# Altium PCB PCB1.PcbDoc
Units mil, origin at the board's own origin, x right, y up, seen from the top; angles counter-clockwise.
Board outline 6000 x 4000 mil, 2 copper layers (Top Layer, Bottom Layer); 26 components, 14 nets, 53 pads, 0 vias.
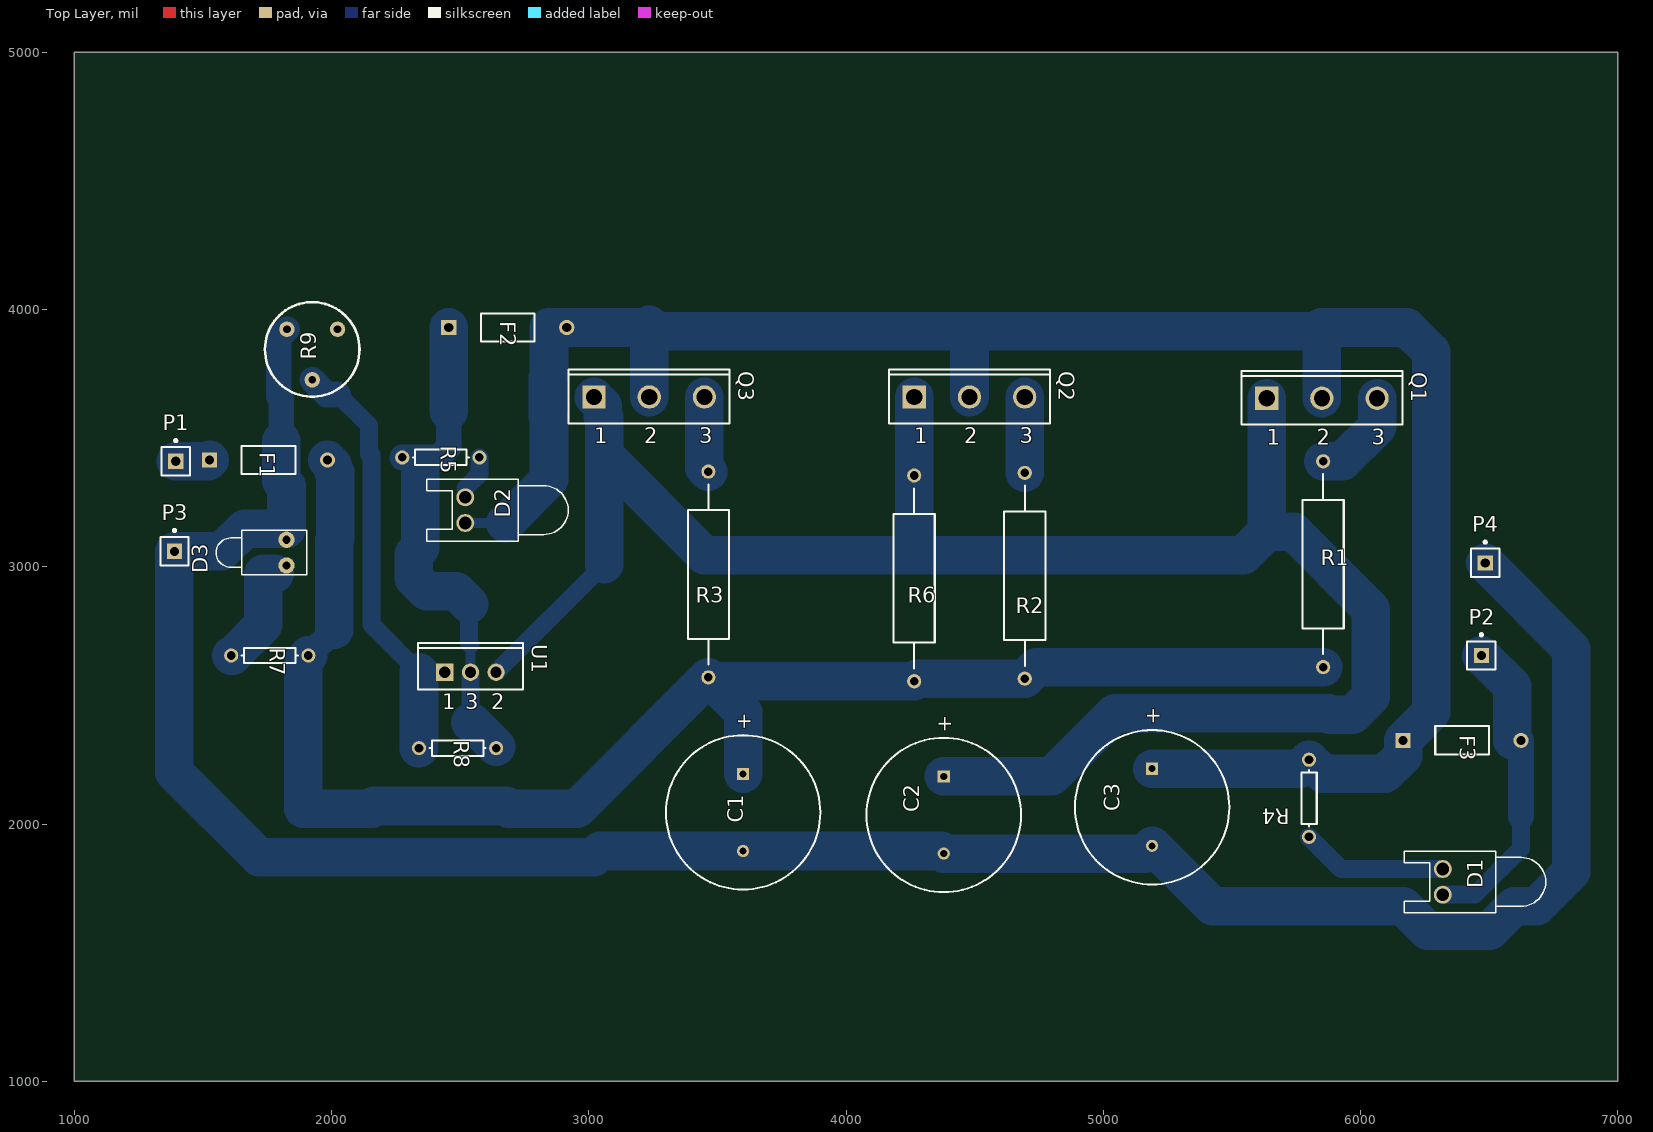
[diagram p0: Top Layer view]
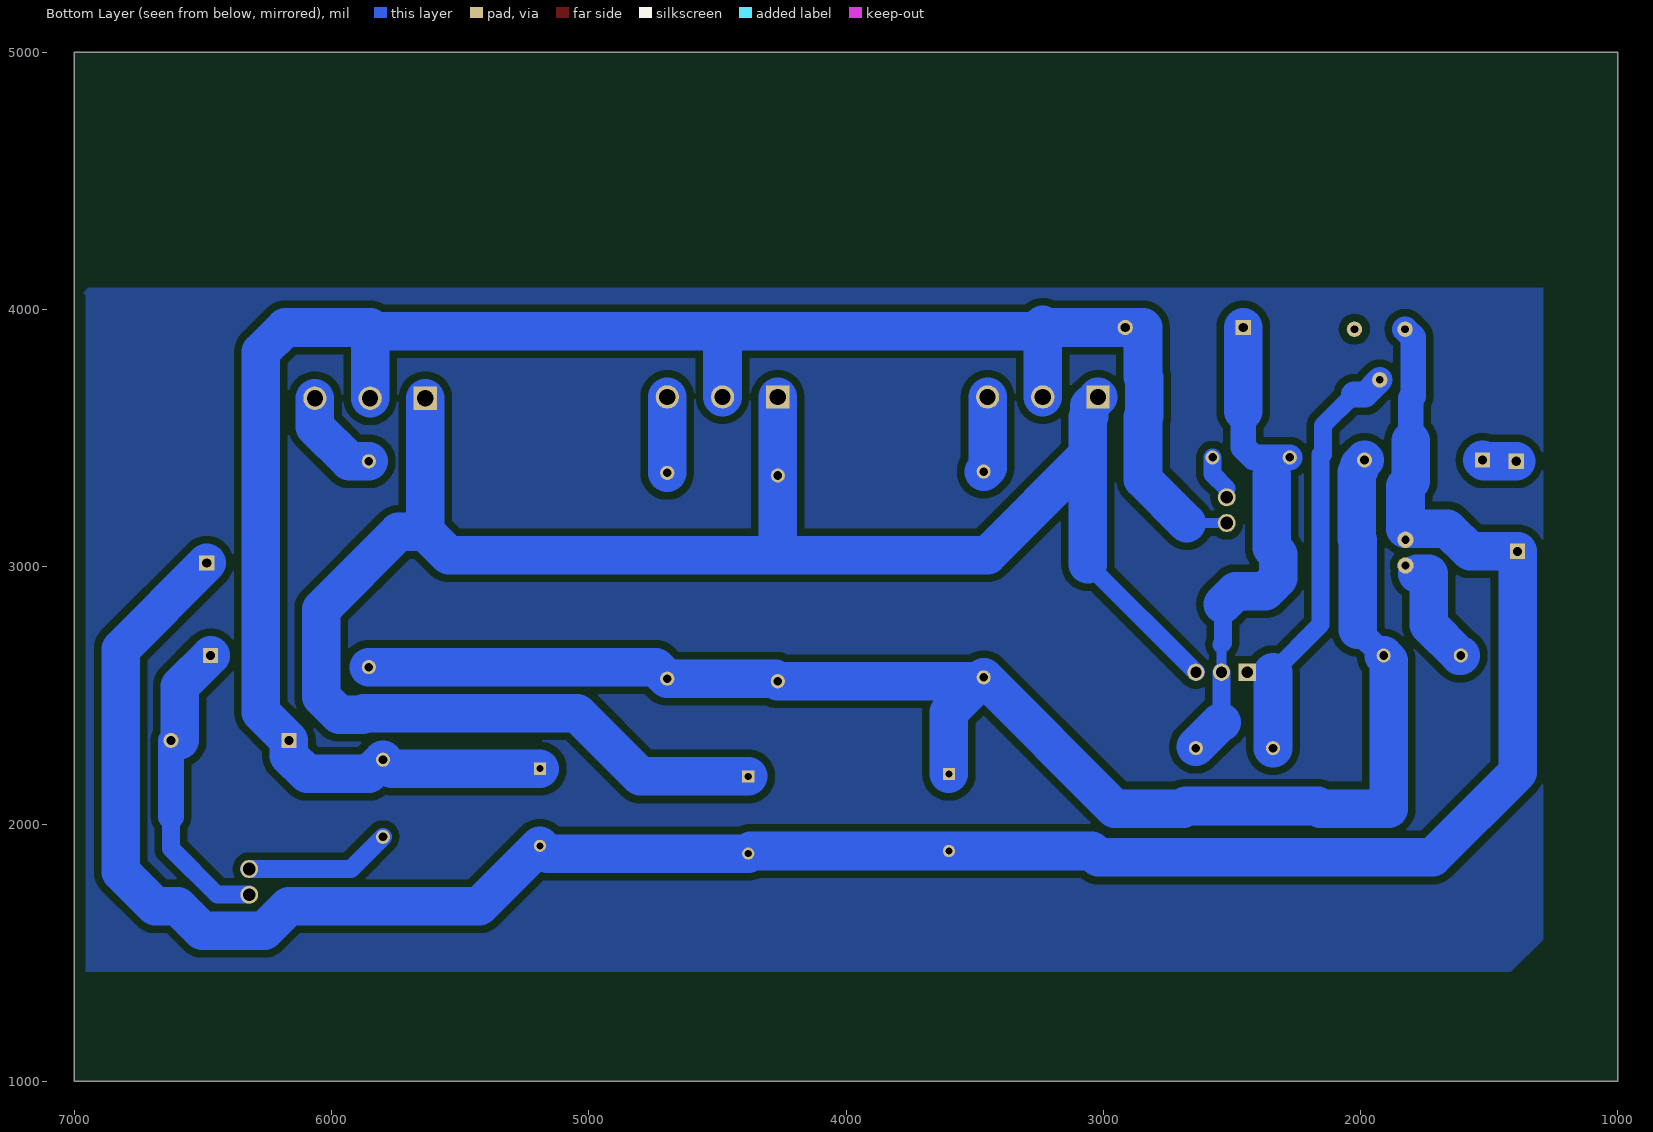
[diagram p1: Bottom Layer view, seen from below]

## Layer stack, top to bottom
Top Solder: solder mask 0.4, Solder Resist, Dk 3.5
Top Layer: signal copper 1.4
Dielectric 1: dielectric 12.6, FR-4, Dk 4.8
Bottom Layer: signal copper 1.4
Bottom Solder: solder mask 0.4, Solder Resist, Dk 3.5

## Board outline
1000,1000 7000,1000 7000,5000 1000,5000

## Design rules (kind name [scope] priority, off if disabled: settings)
Clearance [All] p1: gap=30
PolygonConnect [All] p1: connectstyle=Relief reliefconductorwidth=10 reliefentries=4 polygonreliefangle="90 Angle" airgapwidth=10
RoomDefinition Sheet1 [InComponentClass('Sheet1')] p1: confinementstyle=ConfineIn formatcopy=TRUE lockcomponents=FALSE outline 1265,1410 6985,1410 6985,4090 1265,4090
RoutingLayers [All] p1: top layer_v5=FALSE bottom layer_v5=TRUE
RoutingVias [All] p1: holewidth=28 width=50 viastyle="Through Hole" minholewidth=28 minwidth=50 maxholewidth=28 maxwidth=50
SolderMaskExpansion [All] p1: expansion=4
Width [All] p1: maxlimit=200 minlimit=40 preferedwidth=100
29 further rules are at their usual default settings.

## Components (designator, comment, footprint, x,y, rotation, side; value= is the part's Value field where it differs from the comment)
C1 "Cap Pol1" RB7.6-15 3600,2045 r90 top
C2 "Cap Pol1" RB7.6-15 4380,2035 r90 top
C3 "Cap Pol1" RB7.6-15 5190,2065 r90 top
D1 "LED0" LED-0 6320,1775 r90 top
D2 "LED0" LED-0 2520,3220 r90 top
D3 "LED1" LED-1 1825,3055 r180 top
F1 "Fuse 2" PIN-W2/E2.8 1755,3415 r0 top
F2 "Fuse 1" PIN-W2/E2.8 2685,3930 r0 top
F3 "Fuse 1" PIN-W2/E2.8 6395,2325 r0 top
P1 "Plug" PIN1 1394.33,3410 r0 top
P2 "Plug" PIN1 6470,2655 r0 top
P3 "Plug" PIN1 1389.33,3060 r0 top
P4 "Plug" PIN1 6485,3015 r0 top
Q1 "PNP" TO247 5850,3655 r0 top
Q2 "PNP" TO247 4480,3660 r0 top
Q3 "PNP" TO247 3235,3660 r0 top
R1 "Res2" AXIAL-0.8 5855,3010 r90 top
R2 "Res2" AXIAL-0.8 4695,2965 r90 top
R3 "Res2" AXIAL-0.8 3465,2970 r90 top
R4 "Res1" AXIAL-0.3 5800,2100 r270 top
R5 "Res1" AXIAL-0.3 2425,3425 r0 top
R6 "Res2" AXIAL-0.8 4265,2955 r90 top
R7 "Res1" AXIAL-0.3 1760,2655 r0 top
R8 "Res2" AXIAL-0.3 2490,2295 r0 top
R9 "RPot" POT_10K 1925,3825 r180 top
U1 "LM317T" TO220ABN 2540,2590 r0 top

## Footprints (in the part's own frame and the unit in brackets; to place one, negate y for a bottom-side part, rotate by r counter-clockwise, add the part's x,y. Pads: shape width x height; smd on the part's side, far side on the other; paste and mask are expansions set on the pad)
AXIAL-0.3 [mm] "Axial Device, Thru-Hole; 2 Leads; 0.3 in Pin Spacing"
  round 1.4 hole 0.85: 1(-3.81,0) 2(3.81,0)
  silkscreen extent -2.77,-0.76 2.77,0.76
AXIAL-0.8 [mm] "Axial Device, Thru-Hole; 2 Leads; 0.8 in Pin Spacing"
  round 1.4 hole 0.85: 1(-10.16,0) 2(10.16,0)
  silkscreen extent -8.89,-2.03 8.89,2.03
LED-0 [mil] "LED; 2 Leads"
  round 70 hole 50: 1(50,0) 2(-50,0)
  silkscreen extent -120,-400 120,150
LED-1 [mm] "LED; 2 Leads"
  round 1.6 hole 0.8: 1(0,1.27) 2(0,-1.27)
  silkscreen extent -2,-2.2 6.95,2.2
PIN1 [mm] "Connector; Plug"
  rect 1.5x1.5 hole 0.9: 1(0,0)
  silkscreen extent -1.4,-1.4 1.4,2.17
PIN-W2/E2.8 [mm] "Thru-Hole; 2 Leads"
  rect 1.5x1.5 hole 0.9: 1(-5.825,0)
  round 1.5 hole 0.9: 2(5.825,0)
  silkscreen extent -2.65,-1.4 2.65,1.4
POT_10K [mil]
  round 60 hole 30: 1(-98.43,-98.43) 2(0,98.43) 3(98.43,-98.43)
  silkscreen extent -184,-204 184,164
RB7.6-15 [mm] "Polarized Capacitor (Radial); 2 Leads"
  rect 1.2x1.2 hole 0.7: 1(3.81,0)
  round 1.2 hole 0.7: 2(-3.81,0)
  silkscreen extent -7.62,-7.62 7.62,7.62
TO220ABN [mm] "TO, Thru-Hole, Vertical, Heatsink Mounted; 3 In-Line Leads; Pitch 2.54 mm; Pin sequence 1, 3, 2"
  rect 1.7x1.7 hole 1.1: 1(-2.54,0)
  round 1.7 hole 1.1: 2(2.54,0) 3(0,0)
  silkscreen extent -5.2,-1.7 5.2,2.9
TO247 [mm] "SIP with Mounting Hole; 3 Leads; Body 20 x 15.6 x 5 mm (typ); Pitch 5.45 mm"
  rect 2.3x2.3 hole 1.6: 1(-5.45,0)
  round 2.3 hole 1.6: 2(0,0) 3(5.45,0)
  silkscreen extent -7.95,-2.6 7.95,2.7

## Part data
C1 C2 C3: "Polarized Capacitor (Radial)"
D1 D2: "Typical INFRARED GaAs LED"
D3: "Typical RED GaAs LED"
F1 F2 F3: "Fuse"
Q1 Q2 Q3: "PNP Bipolar Transistor"
R1 R2 R3 R4 R5 R6 R7 R8: "Resistor"
R9: "Potentiometer"
U1: "1.2V to 37V Voltage Regulator"

## Nets (pads, with @x,y where several pads share a name; then routed paths per layer and width w, separated by ;. In a path a pad name is that pad's centre, name@x,y a point inside that pad or via, vN(x,y) a via of type N, cw(c..) or ccw(c..) an arc to the next point about the centre after c; other vN are vias at no path point)
GND: C1.2 C2.2 C3.2 D3.2 P3.1 P4.1 R9.3 | length 9297.4
  Bottom Layer w100: 1804.33,3489.56 1804.33,3654.07 1795,3663.4 1795,3891.85 R9.3
  Bottom Layer w150: 1804.33,3489.56 1804.33,3333.37 1825,3312.7 1825,3148.5 1662.51,3148.5 1574.01,3060 P3.1 1389.33,2200.67 1720,1870 3019.56,1870 3044.56,1895 C1.2 4370,1895 C2.2 5160,1885 C3.2 5425,1680 6167.01,1680 6262.01,1585 6502.07,1585 6597.07,1680 6685,1680 6820,1815 6820,2680 P4.1
NetC1_1: C1.1 F1.2 R1.1 R2.1 R3.1 R6.1 R7.2 | length 6042.7
  Bottom Layer w100: R7.2 2010,2755
  Bottom Layer w150: R7.2 1890,2635 1890,2060 2156.25,2060 2166.25,2070 2678.75,2070 2688.75,2060 2955,2060 R3.1 R3.1@3480,2555 ; F1.2 2005,3394.33 2005,3378.12 2015,3368.12 2015,3108.66 2010,3103.66 2010,2755 ; C1.1 3600,2435 R3.1@3480,2555 ; R1.1 4740,2610 R2.1 4275,2565 R6.1 R3.1@3480,2555
NetC2_1: C2.1 Q1.1 Q2.1 Q3.1 R6.2 U1.2 | length 7831.1
  Bottom Layer w70: U1.2 3060,3010
  Bottom Layer w150: Q3.1 3055,3625.43 3055,3585.44 3060,3580.44 3060,3435 ; 3060,3010 3060,3435 ; Q2.1 4265.43,3355.43 R6.2 4265,3045 ; C2.1 4800,2185 5045,2430 5874.56,2430 5879.56,2425 5970,2425 6040,2495 6040,2835 5739.57,3135.43 5635.43,3135.43 ; Q1.1 5635.43,3135.43 ; 3060,3435 3450,3045 4265,3045 ; 4265,3045 5545,3045 5635.43,3135.43
NetC3_1: C3.1 D2.2 F2.2 F3.1 Q1.2 Q2.2 Q3.2 R4.1 | length 7938.6
  Bottom Layer w40: D2.2 2675,3170
  Bottom Layer w150: 2675,3170 2845.43,3340.43 2845.43,3580.44 2840.43,3585.44 2840.43,3734.56 2845.43,3739.56 2845.43,3930 F2.2 3225,3930 3210,3915 3235,3890 Q3.2 ; 3235,3940 3260,3915 4480,3915 ; Q2.2 4480,3915 ; C3.1 5765,2215 R4.1 5855,2195 6095,2195 6165.67,2265.67 F3.1 6275,2434.33 6275,3835 6180,3930 5850,3930 ; Q1.2 5850,3930 ; 4480,3915 5835,3915 5850,3930
NetD1_1: D1.1 R4.2 | length 571.8
  Bottom Layer w70: R4.2 5925,1825 D1.1
NetD1_2: D1.2 F3.2 P2.1 | length 1178.4
  Bottom Layer w70: D1.2 6444.08,1725 6624.33,1905.25 6624.33,2029.33
  Bottom Layer w100: 6624.33,2029.33 F3.2
  Bottom Layer w150: P2.1 6590,2535 6590,2325
NetD2_1: D2.1 R5.2 | length 142.8
  Bottom Layer w70: 2520,3305 2575,3360 R5.2
NetD3_1: D3.1 R7.1 | length 416.7
  Bottom Layer w150: R7.1 1615,2655 1735,2775 1735,2973.5 1778.48,2973.5
NetF1_1: F1.1 P1.1 | length 133.4
  Bottom Layer w150: P1.1 1520.67,3410 F1.1
NetF2_1: F2.1 R5.1 R8.2 U1.3 | length 1930
  Bottom Layer w40: U1.3 2540,2698.35
  Bottom Layer w70: 2535,2855 2535,2703.35 2540,2698.35 ; 2540,2395 U1.3
  Bottom Layer w100: R5.1 2415,3425 2455.67,3465.67 2455.67,3605.67
  Bottom Layer w150: 2345,3355 2345,3074.08 2320,3049.08 2320,2955 2370,2905 2485,2905 2535,2855 ; 2455.67,3605.67 F2.1 ; 2540,2395 2545,2395 R8.2@2640,2300
NetQ1_3: Q1.3 R1.2 | length 375.7
  Bottom Layer w150: R1.2 5930,3410 6064.57,3544.57 Q1.3
NetQ2_3: Q2.3 R2.2 | length 295.2
  Bottom Layer w150: Q2.3 4695,3659.57 R2.2
NetQ3_3: Q3.3 R3.2 | length 296.4
  Bottom Layer w150: Q3.3 3449.57,3385.43 R3.2
NetR8_1: R8.1 R9.2 U1.1 | length 1724.8
  Bottom Layer w50: 2340,2590 U1.1
  Bottom Layer w70: 2025,3670 2145,3550 2145,3436.11 ; 2155,3436.11 2155,2775 2340,2590
  Bottom Layer w100: R9.2 1981.57,3670 2025,3670
  Bottom Layer w150: R8.1 2340,2590
pads on no net: R9.1

## Polygon pours and split planes (outlines as drawn)
no net on Bottom Layer "Component Side-No Net" (solid, pour order 2): 1290,4085 6945,4085 6965,4065 6955,4055 6955,1425 1415,1425 1290,1550

## Text inside footprints (layer, text, board x,y; h text height)
C1: Top Overlay "+" at 3629.01,2365.15 h59.06 r90
C2: Top Overlay "+" at 4409.01,2355.15 h59.06 r90
C3: Top Overlay "+" at 5219.01,2385.15 h59.06 r90
Q1: Top Overlay "3" at 6044.57,3474.88 h59.06; Top Overlay "2" at 5830,3474.88 h59.06; Top Overlay "1" at 5635.43,3474.88 h59.06
Q2: Top Overlay "3" at 4674.57,3479.88 h59.06; Top Overlay "2" at 4460,3479.88 h59.06; Top Overlay "1" at 4265.43,3479.88 h59.06
Q3: Top Overlay "3" at 3429.57,3479.88 h59.06; Top Overlay "2" at 3215,3479.88 h59.06; Top Overlay "1" at 3020.43,3479.88 h59.06
U1: Top Overlay "1" at 2430.16,2445.31 h59.06; Top Overlay "2" at 2620.32,2445.32 h59.06; Top Overlay "3" at 2520.32,2445.32 h59.06